# EAGLE board breakouts (EAGLE 5.11)
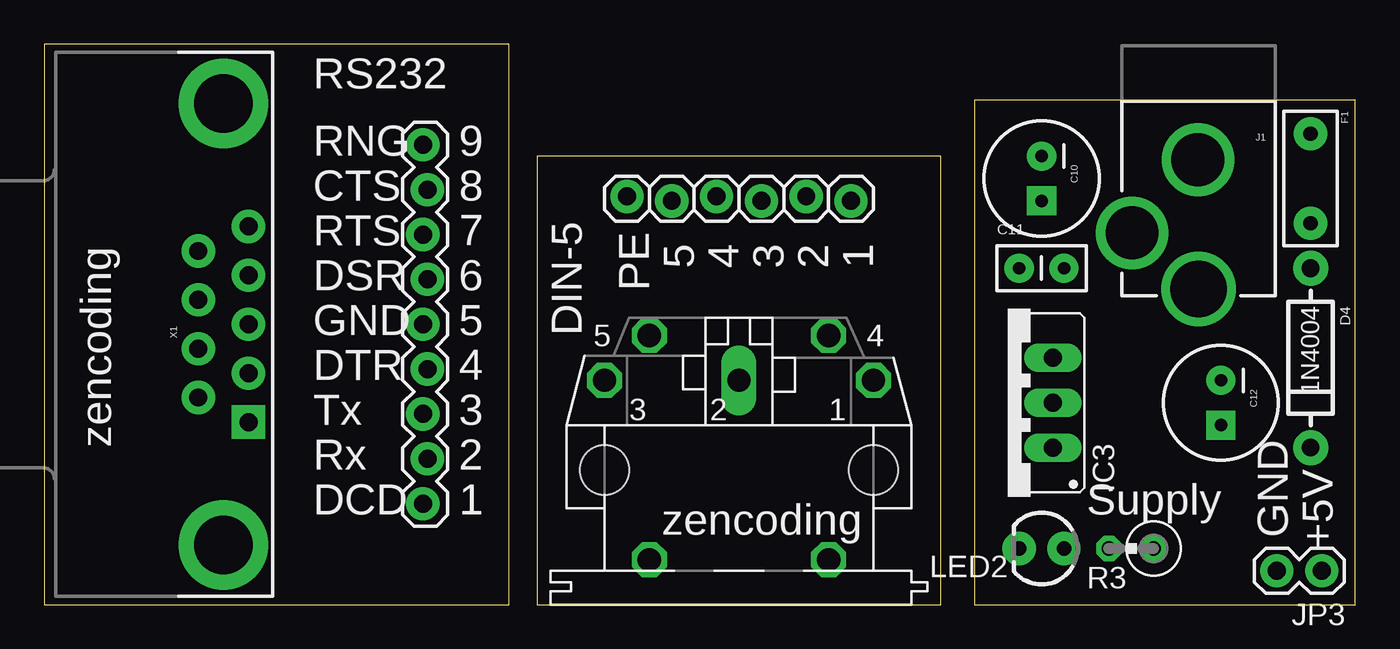
[diagram p0: board, top side]
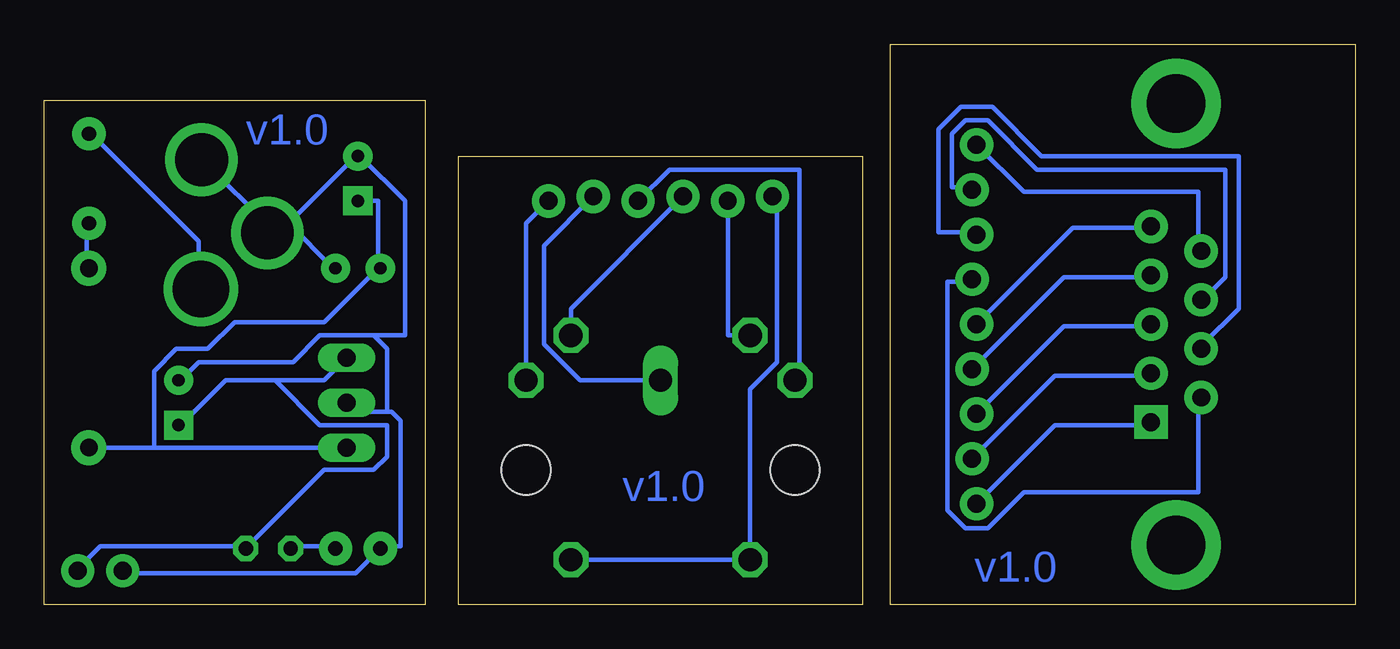
[diagram p1: board, bottom side, seen from below]

Size 74.3 x 31.74 mm. Coordinates in mm from the lower left corner, seen from the top.
Outline: 0,0 26.34,0 26.34,31.74 0,31.74 0,0
Outline: 27.94,0 50.8,0 50.8,25.4 27.94,25.4 27.94,0
Outline: 52.7,28.57 52.7,0 74.3,0 74.3,28.57 52.7,28.57
Copper layers (1*16): Top 0.035mm / dielectric 1.5mm / Bottom 0.035mm
Design rules "SparkFun *": minimum track width 10mil, minimum drill 20mil, track to track 12mil, track to pad 12mil, pad to pad 12mil, via to via 12mil, smd to smd 12mil, copper to edge 12mil, drill to drill 8mil, minimum pad ring 12mil, minimum via ring 10mil, stop-mask expansion 4mil, vias tented up to drill 25mil, thermal gap 10mil

## Footprints (pad centres in the part's own frame; a part is rotated, then mirrored left to right if it is on the bottom)
CPOL-RADIAL-100UF-25V = drill 0.7 pad 1.651 square: 1 1.27,0 | drill 0.7 pad 1.651 round: 2 -1.27,0
CAP-PTH-SMALL2 = drill 0.7 pad 1.651 round: 1 0,0; 2 2.54,0
DIODE-1N4001 = drill 1 pad 1.981 round: A -5.08,0; C 5.08,0
PTC = drill 0.8 pad 1.88 round: P$1 -2.54,0; P$2 2.54,0
78XXS = drill 1.016 long: GND 0,-2.54; IN -2.54,-2.54; OUT 2.54,-2.54
POWER_JACK_PTH_LOCK = drill 2.997 pad 4.115 round: GND 0.025,6.557; GNDBREAK 3.762,10.7 | drill 3.2 pad 4.115 round: PWR 0,13.878
1X09_LOCK = drill 1.016 pad 1.88 round: 1 0,0.127; 2 2.54,-0.127; 3 5.08,0.127; 4 7.62,-0.127; 5 10.16,0.127; 6 12.7,-0.127; 7 15.24,0.127; 8 17.78,-0.127; 9 20.32,0.127
1X06_LOCK = drill 1.016 pad 1.88 round: 1 0,0; 2 2.54,-0.254; 3 5.08,0; 4 7.62,-0.254; 5 10.16,0; 6 12.7,-0.254
1X02 = drill 1.016 pad 1.88 round: 1 0,0; 2 2.54,0
LED3MM = drill 0.813 pad 1.88 round: A -1.27,0; K 1.27,0
0309V = drill 0.813 octagon: 1 -1.27,0; 2 1.27,0
DB9 = drill 1.016 pad 1.88 square: 1 -5.54,-1.42 | drill 1.016 pad 1.88 round: 2 -2.77,-1.42; 3 0,-1.42; 4 2.77,-1.42; 5 5.54,-1.42; 6 -4.15,1.42; 7 -1.38,1.42; 8 1.38,1.42; 9 4.15,1.42 | drill 3.302 pad 5.08 round: G1 -12.5,0; G2 12.5,0
DIN-5-PTH = drill 1.321 octagon: 1 7.62,5.08; 3 -7.62,5.08; 4 5.08,7.62; 5 -5.08,7.62; PE -5.08,-5.08; PE@ 5.08,-5.08 | drill 1.321 long: 2 0,5.08 | hole 2.794: 7.62,0; -7.62,0

## Placement (x,y rotation side)
C10  100uF  [CPOL-RADIAL-100UF-25V]  56.52,24.13 270 top
C11  0.1uF  [CAP-PTH-SMALL2]  55.24,19.05 0 top
C12  100uF  [CPOL-RADIAL-100UF-25V]  66.67,11.43 270 top
D4  1N4004  [DIODE-1N4001]  71.75,13.97 270 top
F1  500mA  [PTC]  71.75,24.13 270 top
IC3  7805  [78XXS]  54.61,11.43 90 top
J1  POWER_JACK  [POWER_JACK_PTH_LOCK]  65.41,31.75 180 top
JP1  [1X09_LOCK]  21.59,5.71 90 top
JP2  [1X06_LOCK]  45.72,22.86 180 top
JP3  [1X02]  72.39,1.91 180 top
LED2  PWR  [LED3MM]  56.52,3.17 180 top
R3  1k  [0309V]  61.59,3.17 180 top
X1  FEMALE  [DB9]  10.16,15.88 90 top
X2  [DIN-5-PTH]  39.37,7.62 0 top

## Library data of the parts
C10-C12 D4 F1 J1 JP1-JP3 LED2 X1 = SparkFun
IC3 = v-reg
R3 = resistor
X2 = zencoding; JAYCAR: PS0350; SPARKFUN: PRT-09536

## Nets
N$1: JP1.1 X1.1
N$2: JP1.2 X1.2
N$3: JP1.3 X1.3
N$4: JP1.4 X1.4
N$5: JP1.5 X1.5
N$6: JP1.6 X1.6
N$7: JP1.7 X1.7
N$8: JP1.8 X1.8
N$9: JP1.9 X1.9
N$10: JP2.1 X2.1
N$11: JP2.4 X2.4
N$12: JP2.2 X2.2
N$13: JP2.6 X2.PE X2.PE@
N$14: LED2.A R3.2
N$15: JP2.5 X2.5
N$16: JP2.3 X2.3
N$17: F1.P$1 J1.PWR
N$18: D4.A F1.P$2
N$19: C12.1 IC3.OUT JP3.1 R3.1
N$20: C10.2 C11.2 C12.2 IC3.GND J1.GND J1.GNDBREAK JP3.2 LED2.K
VIN: C10.1 C11.1 D4.C IC3.IN

## Tracks (layer width: path | path; a pad name or v marks a point on that pad's centre or on a via)
N$1
  Bottom 0.254: JP1.1 17.02,10.16 11.68,10.16 X1.1
N$2
  Bottom 0.254: JP1.2 17.02,12.95 11.68,12.95 X1.2
N$3
  Bottom 0.254: JP1.3 16.51,15.75 11.68,15.75 X1.3
N$4
  Bottom 0.254: JP1.4 16.51,18.54 11.68,18.54 X1.4
N$5
  Bottom 0.254: JP1.5 16,21.34 11.68,21.34 X1.5
N$6
  Bottom 0.254: X1.6 8.89,11.68 8.89,6.35 18.8,6.35 20.83,4.32 22.1,4.32 23.11,5.33 23.11,18.29 21.84,18.29 JP1.6
N$7
  Bottom 0.254: X1.7 8.64,14.73 6.6,16.76 6.6,25.4 17.78,25.4 20.57,28.19 22.35,28.19 23.62,26.92 23.62,21.08 21.59,21.08 JP1.7
N$8
  Bottom 0.254: X1.8 8.64,17.27 7.37,18.54 7.37,24.64 18.03,24.64 20.83,27.43 22.1,27.43 22.86,26.67 22.86,23.62 21.84,23.62 JP1.8
N$9
  Bottom 0.254: X1.9 8.89,20.07 8.89,23.37 18.8,23.37 JP1.9
N$10
  Bottom 0.254: JP2.1 46.99,21.59 X2.1
N$11
  Bottom 0.254: JP2.4 44.45,16.76 X2.4
N$12
  Bottom 0.254: JP2.2 45.97,20.32 45.97,14.73 43.94,12.7 X2.2
N$13
  Bottom 0.254: JP2.6 32.77,22.86 32.77,13.72 34.29,12.19 X2.PE X2.PE@
N$14
  Bottom 0.254: R3.2 60.2,3.3 57.91,3.3 LED2.A
N$15
  Bottom 0.254: JP2.5 35.56,15.24 X2.5
N$16
  Bottom 0.254: JP2.3 38.86,24.64 31.5,24.64 31.5,12.95 X2.3
N$17
  Bottom 0.254: F1.P$1 71.63,26.67 65.53,20.57 65.53,18.03 J1.PWR
N$18
  Bottom 0.254: F1.P$2 71.88,21.59 71.88,19.05 D4.A
N$19
  Bottom 0.254: JP3.1 72.39,2.03 71.12,3.3 62.99,3.3 R3.1 58.42,7.62 55.63,7.62 54.86,8.38 54.86,10.16 58.67,10.16 61.21,12.7 | IC3.OUT 58.42,12.7 61.21,12.7 | 61.21,12.7 64.01,12.7 66.55,10.16 C12.1
N$20
  Bottom 0.254: 60.45,21.59 60.96,21.08 61.47,21.08 J1.GNDBREAK | 60.45,21.59 56.64,25.4 C10.2 56.39,25.4 53.85,22.86 53.85,15.24 55.63,15.24 | 60.45,21.59 57.91,19.05 C11.2 | 60.45,21.59 J1.GNDBREAK | J1.GND 65.28,25.15 61.47,21.34 61.21,21.34 J1.GNDBREAK | IC3.GND 56.64,10.92 54.86,10.92 | 54.86,10.92 54.61,10.92 54.1,10.41 54.1,3.3 55.12,3.3 LED2.K 56.64,1.78 69.85,1.78 JP3.2 | 55.63,15.24 58.67,15.24 60.2,13.72 65.53,13.72 66.55,12.7 C12.2 | 55.63,15.24 54.86,14.48 54.86,10.92
VIN
  Bottom 0.254: 55.37,19.05 55.37,22.86 C10.1 | IC3.IN 68.07,8.89 | 68.07,8.89 D4.C | 55.37,19.05 58.42,16 63.5,16 65.02,14.48 66.8,14.48 68.07,13.21 68.07,8.89 | 55.37,19.05 C11.1

## Text on the board
Bottom: v1.0 | v1.0 | v1.0
tPlace: RS232 | RNG | 9 | CTS | 8 | RTS | 7 | 5 | 4 | 3 | 2 | 1 | DSR | 6 | PE | GND | 5 | DIN-5 | DTR | 4 | Tx | 3 | zencoding | Rx | 2 | zencoding | DCD | 1 | Supply | GND | +5V